# Altium PCB Flomio BLE-NFC.PcbDoc (part 1 of 2)
Units mil, origin at the board's own origin, x right, y up, seen from the top; angles counter-clockwise.
Board outline 3543.31 x 3543.31 mil, 2 copper layers (Top Layer, Bottom Layer), stack 61.2 mil thick; 153 components, 99 nets, 427 pads, 266 vias.
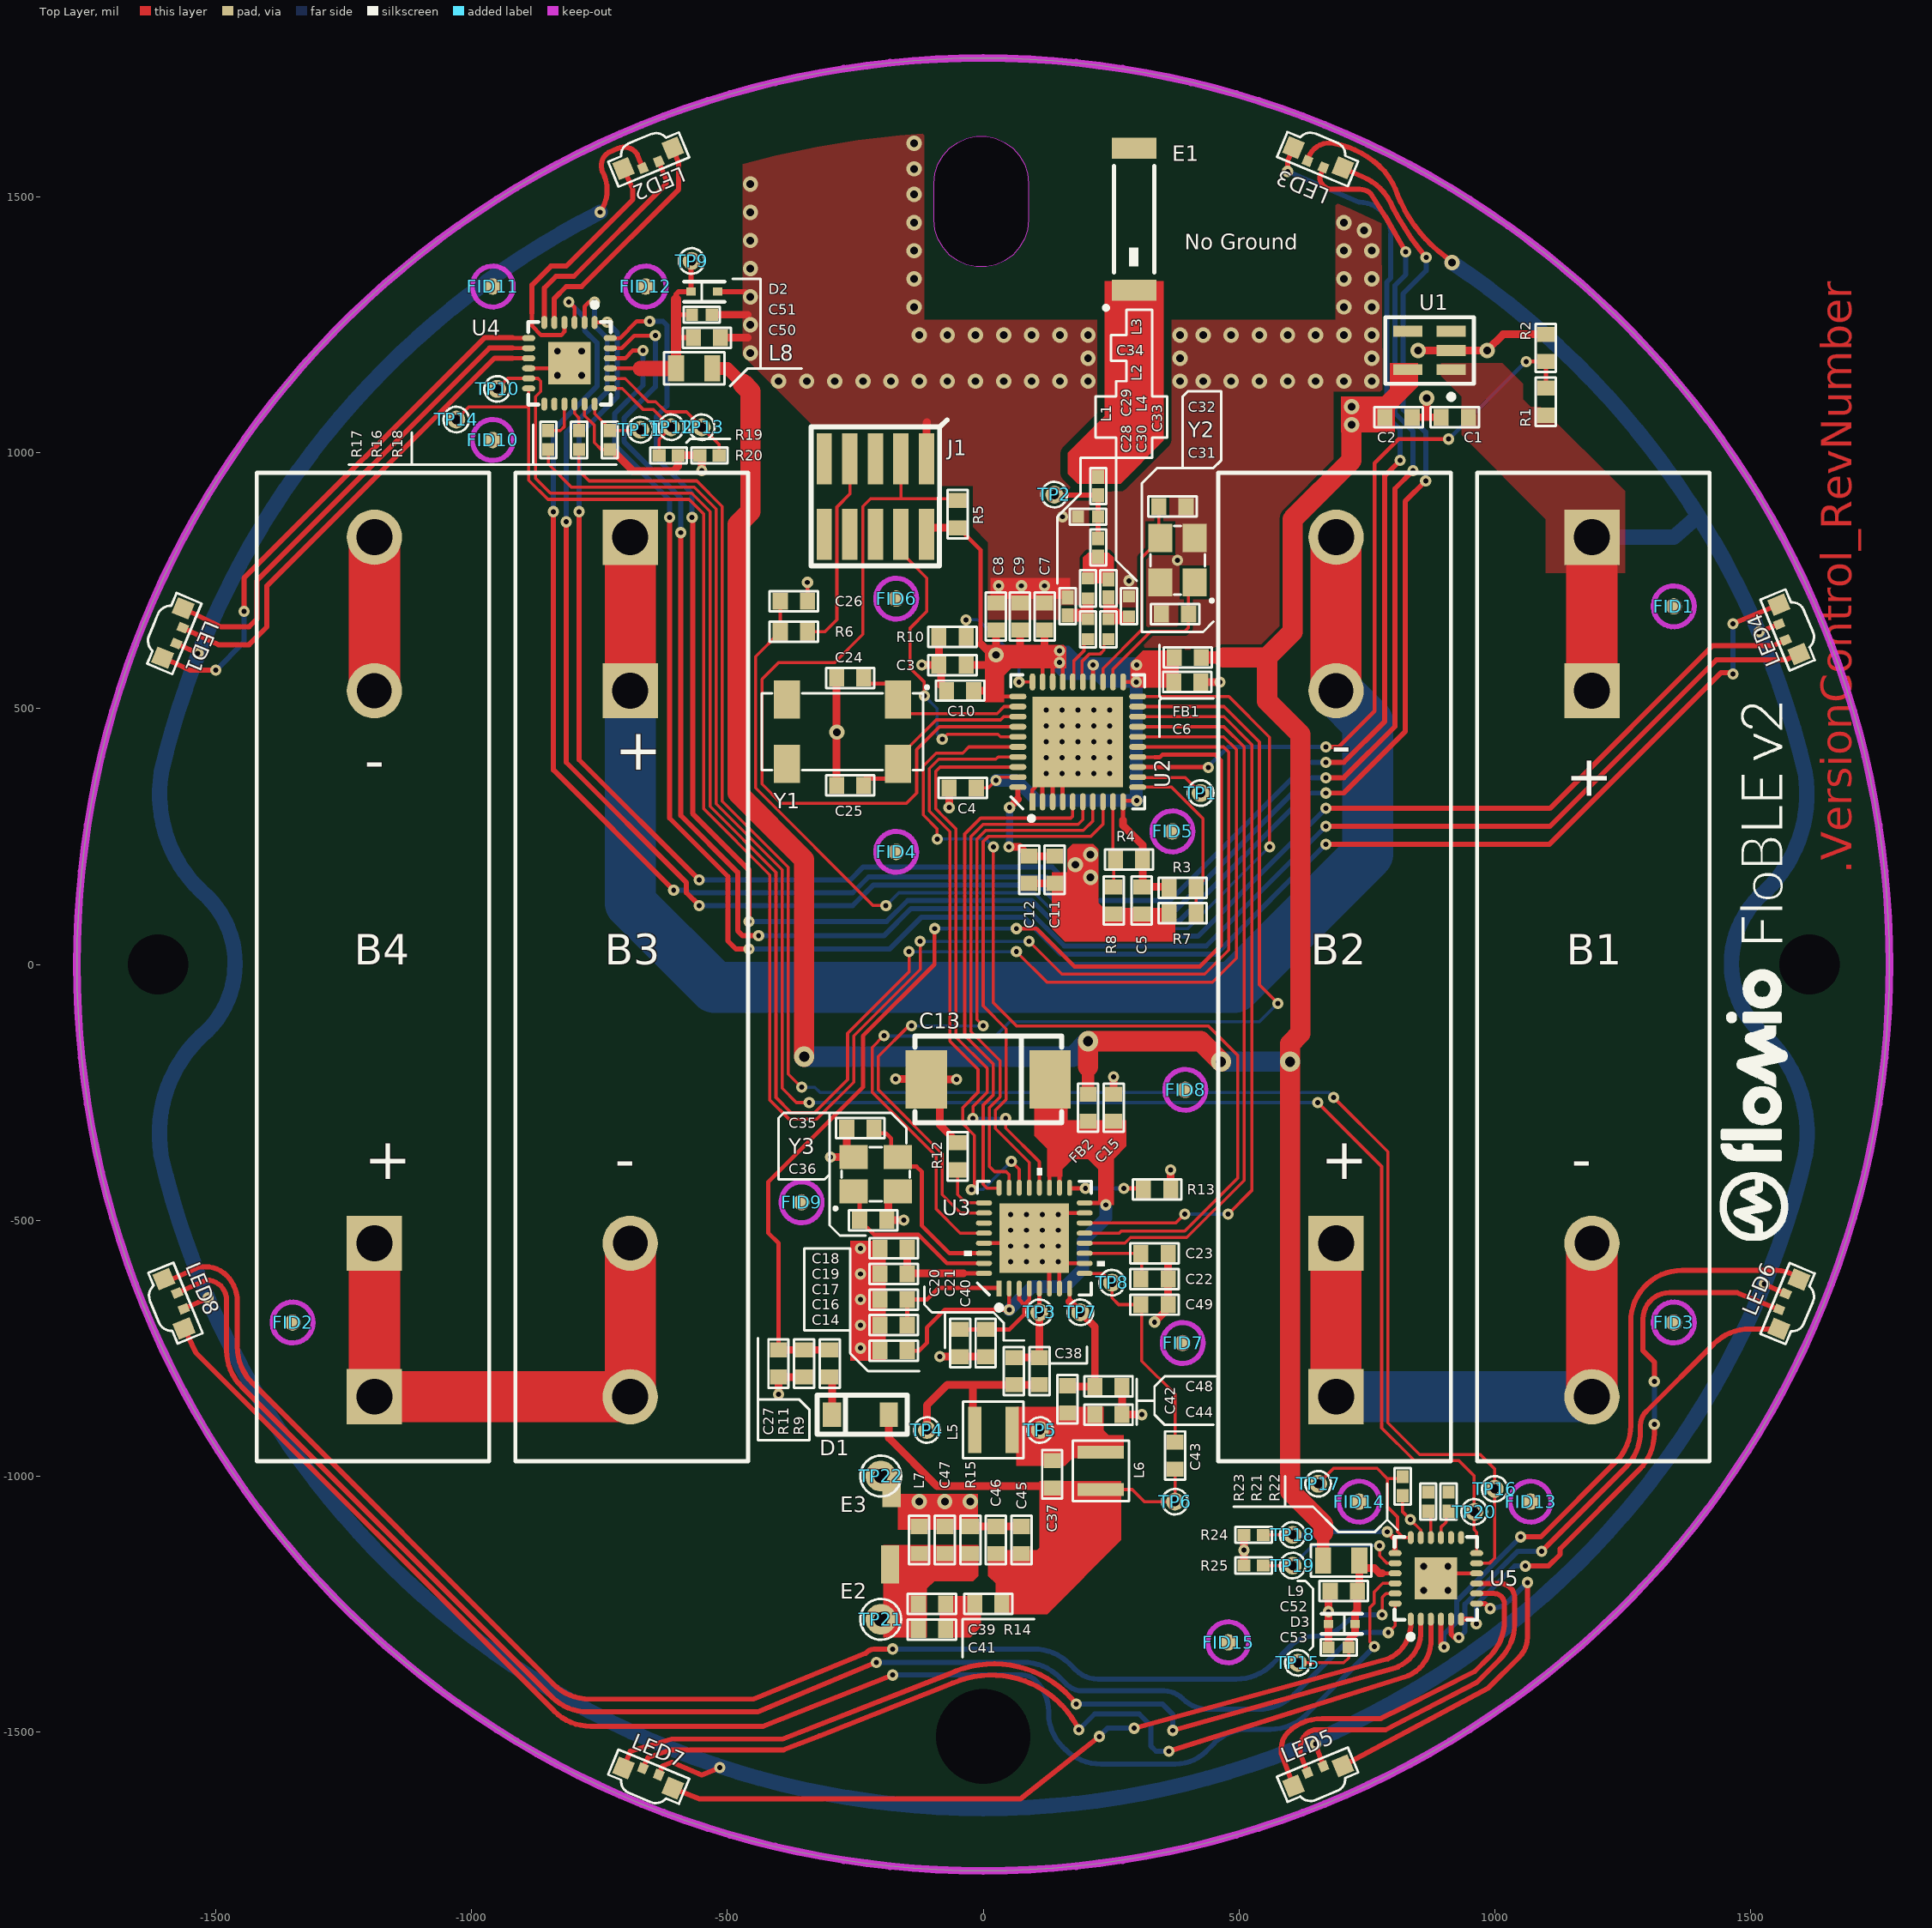
[diagram p0: Top Layer view]
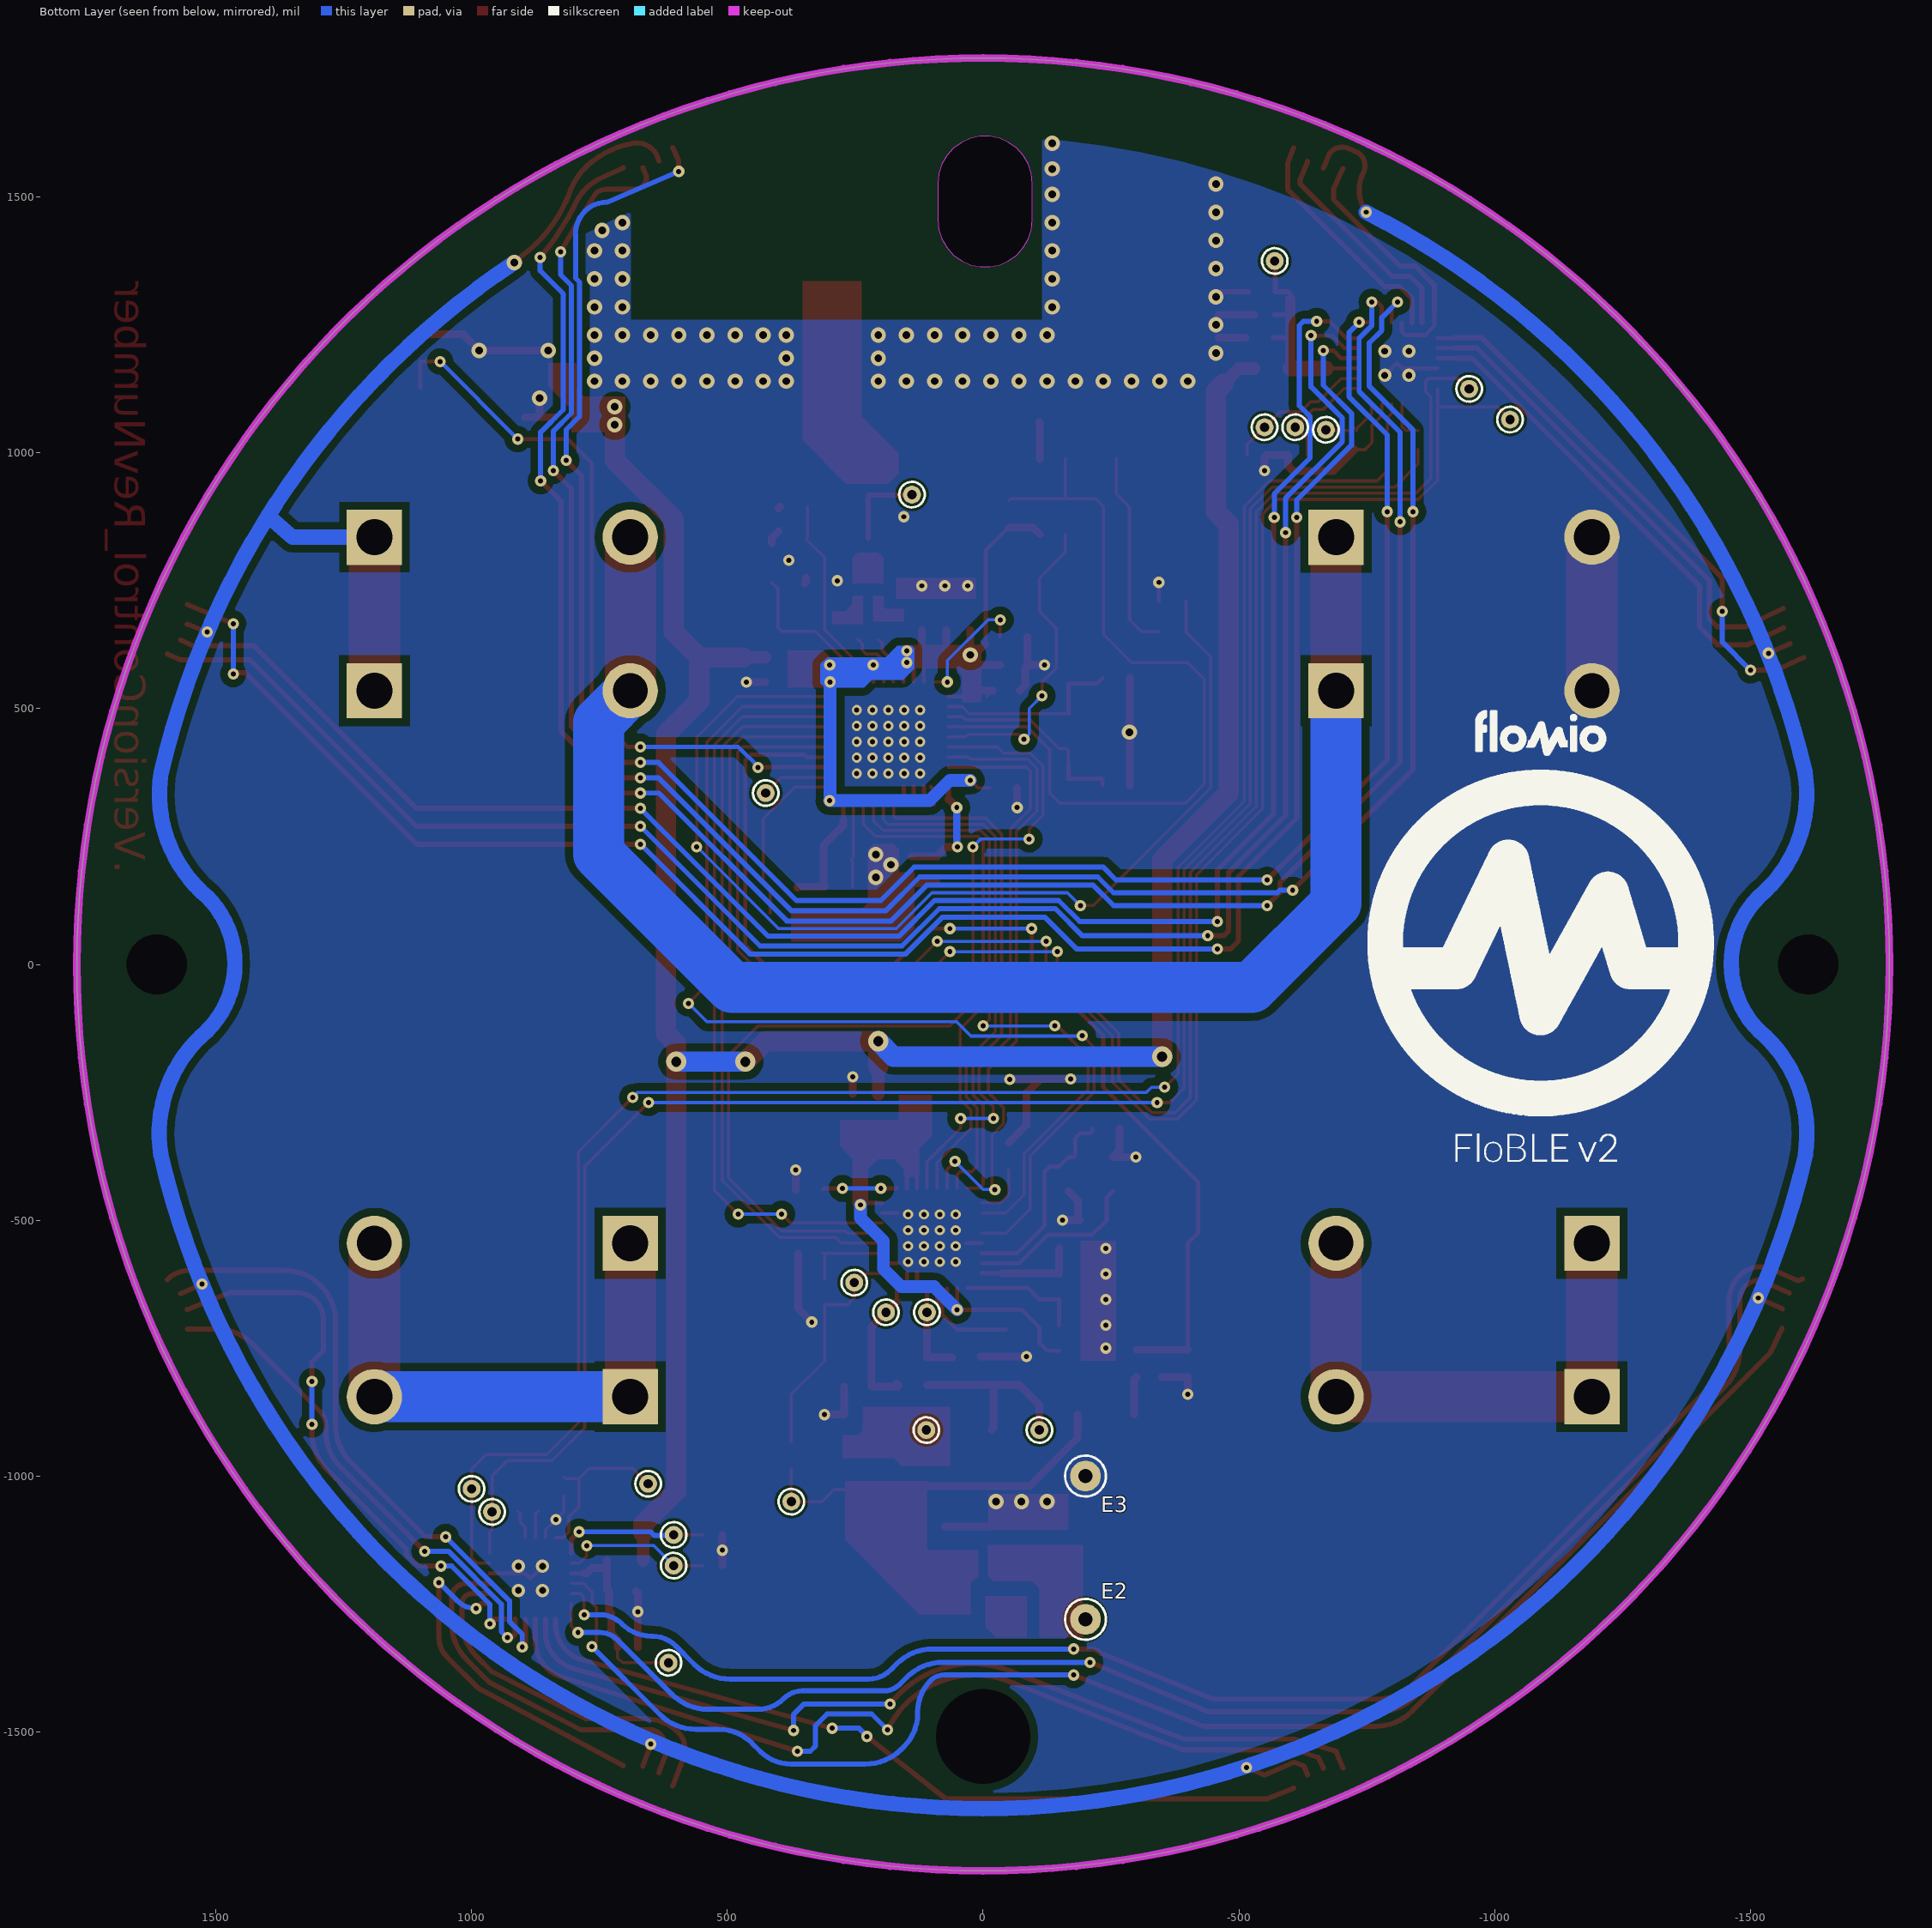
[diagram p1: Bottom Layer view, seen from below]

## Layer stack, top to bottom
Top Solder: solder mask 0.4, Solder Resist, Dk 3.5
Top Layer: signal copper 1.4
Dielectric1: core 58.4, FR-4, Dk 4.8
Bottom Layer: signal copper 1.4
Bottom Solder: solder mask 0.4, Solder Resist, Dk 3.5

## Board outline
-1771.65,0 ccw(c0,0) 0,-1771.65 ccw(c0,0) 1771.65,0 ccw(c0,0) 0,1771.65 ccw(c0,0)
cut-out: -96.32,1526.49 -94.3,1545.73 -88.32,1564.12 -78.65,1580.87 -65.71,1595.25 -50.06,1606.62 -32.39,1614.48 -13.47,1618.5 5.87,1618.5 24.79,1614.48 42.46,1606.62 58.11,1595.25 71.05,1580.87 80.72,1564.12 86.7,1545.73 88.72,1526.49 88.72,1455.63 86.7,1436.39 80.72,1417.99 71.05,1401.24 58.11,1386.87 42.46,1375.5 24.79,1367.63 5.87,1363.61 -13.47,1363.61 -32.39,1367.63 -50.06,1375.5 -65.71,1386.87 -78.65,1401.24 -88.32,1417.99 -94.3,1436.39 -96.32,1455.63

## Design rules (kind name [scope] priority, off if disabled: settings)
AcuteAngle [All] p1: minimum=7.00000000000000E+0001 checktracksonly=FALSE
Clearance Clearance_Bot-GND-Plane [InPolygon AND InNet('GND') AND OnLayer('Bottom Layer')] p1: gap=15
Clearance "Schematic Clearance Constraint" [InNet('BLE_ANT')] p2: gap=15
Clearance [All] p3: gap=6
Clearance Clearance_Grounds [InPolygon] p4: gap=15
FabricationTestPointUsage TestPointUsage [All] p1: valid=0 allowmultiple=FALSE
FabricationTestpoint Testpoint [All] p1: side=3 testpointundercomponent=TRUE minsize=40 maxsize=100 preferedsize=60 minholesize=20 maxholesize=40 preferedholesize=32 testpointgrid=1 allowsidetop=TRUE allowsidebottom=TRUE usegrid=TRUE gridtolerance=0.01
HoleSize HoleSize-drills [not InNetClass('All Nets')] p1: absolutevalues=TRUE maxlimit=1000 minlimit=1 maxpercent=80.000 minpercent=20.000
HoleSize [All] p2: absolutevalues=TRUE maxlimit=100 minlimit=1 maxpercent=80.000 minpercent=20.000
HoleToHoleClearance [All] p1: gap=3 allowstackedmicrovias=TRUE
MinimumAnnularRing [All] p1: minimumring=7.5
PasteMaskExpansion [All] p1: expansion=-1
PlaneClearance [All] p1: clearance=15
PlaneConnect [All] p1: planeconnectstyle=Relief reliefexpansion=10 reliefentries=4 reliefconductorwidth=15 reliefairgap=10
PolygonConnect PolygonConnect_1 [All] p1: connectstyle=Direct reliefconductorwidth=10 reliefentries=4 polygonreliefangle="90 Angle" airgapwidth=10
PolygonConnect PolygonConnect_ground [InNet('GND') And ispad] p2: connectstyle=Relief reliefconductorwidth=15 reliefentries=4 polygonreliefangle="90 Angle" airgapwidth=10
PolygonConnect [InNet('GND') and isvia] p3: connectstyle=Direct reliefconductorwidth=15 reliefentries=4 polygonreliefangle="45 Angle" airgapwidth=10
RoomDefinition "U_Flomio BLE-NFC - SoC" [InComponentClass('U_Flomio BLE-NFC - SoC')] p1: confinementstyle=ConfineIn formatcopy=TRUE lockcomponents=FALSE outline -3489.84,-811.2 -2089.84,-811.2 -2089.84,168.8 -3489.84,168.8
RoomDefinition "U_Flomio BLE-NFC - RFID" [InComponentClass('U_Flomio BLE-NFC - RFID')] p2: confinementstyle=ConfineIn formatcopy=TRUE lockcomponents=FALSE outline -3786.8,459.8 -2086.8,459.8 -2086.8,1459.8 -3786.8,1459.8
RoomDefinition "U_Flomio BLE-NFC - Power" [InComponentClass('U_Flomio BLE-NFC - Power')] p3: confinementstyle=ConfineIn formatcopy=TRUE lockcomponents=FALSE outline 2915,-498 5084.27,-498 5084.27,391 2915,391
RoomDefinition LED2 [InComponentClass('LED2')] p4: confinementstyle=ConfineIn formatcopy=TRUE lockcomponents=FALSE outline -1810.68,-2500.2 2001.2,-2500.2 2001.2,-2125.2 -1810.68,-2125.2
RoomDefinition LED1 [InComponentClass('LED1')] p5: confinementstyle=ConfineIn formatcopy=TRUE lockcomponents=FALSE outline -1798.8,2029.8 2001.2,2029.8 2001.2,2294.8 -1798.8,2294.8
RoutingVias [All] p1: holewidth=15 width=30 viastyle="Through Hole" minholewidth=10 minwidth=22 maxholewidth=25 maxwidth=50
SMDNeckDown [All] p1: percent=75.000
SMDToCorner [All] p1: distance=50000
SilkToSilkClearance [All] p1: silktosilkclearance=4
SilkToSolderMaskClearance SilkscreenOverComponentPads [IsPad] p1: minsilkscreentomaskgap=4 clearancetoexposedcopper=TRUE
SolderMaskExpansion [All] p1: expansion=2
Width "Schematic Width Constraint" [InNet('BLE_ANT')] p1: maxlimit=113 minlimit=113 preferedwidth=113
Width WidthDigital [InNetClass('Digital')] p2: maxlimit=6 minlimit=6 preferedwidth=6
Width WidthLowPower [InNetClass('Power')] p3: maxlimit=125 minlimit=9 preferedwidth=10
Width WidthVacPower [InNetClass('ACPower')] p4: maxlimit=200 minlimit=20 preferedwidth=20
Width [All] p5: maxlimit=200 minlimit=6 preferedwidth=10
21 further rules are at their usual default settings.

## Classes and differential pairs
component class LED1: C50 C51 D2 FID10 FID11 FID12 L8 LED1 LED2 LED3 LED4 R16 R17 R18 R19 R20 TP9 TP10 TP11 TP12 TP13 TP14 U4
component class LED2: C52 C53 D3 FID13 FID14 FID15 L9 LED5 LED6 LED7 LED8 R21 R22 R23 R24 R25 TP15 TP16 TP17 TP18 TP19 TP20 U5
component class "U_Flomio BLE-NFC - Power": B1 B2 B3 B4 C1 C2 C3 C4 C5 C6 C7 C8 C9 C10 C11 C12 C13 C14 C15 C16 C17 C18 C19 C20 C21 C22 C23 FB1 FB2 FID1 FID2 FID3 R1 R2 U1
component class "U_Flomio BLE-NFC - RFID": C35 C36 C37 C38 C39 C40 C41 C42 C43 C44 C45 C46 C47 C48 C49 E2 E3 FID7 FID8 FID9 L5 L6 L7 R12 R13 R14 R15 TP3 TP4 TP5 TP6 TP7 TP8 TP21 TP22 U3 Y3
component class "U_Flomio BLE-NFC - SoC": C24 C25 C26 C27 C28 C29 C30 C31 C32 C33 C34 D1 E1 FID4 FID5 FID6 J1 L1 L2 L3 L4 R3 R4 R5 R6 R7 R8 R9 R10 R11 TP1 TP2 U2 Y1 Y2
net class CI[1..2]: CI1 CI2
net class CO[1..2]: CO2
net class DI[1..2]: DI1 DI2
net class DO[1..2]: DO2
channel class "Flomio BLE-NFC - LED Array": LED1 LED2

## Components (designator, comment, footprint, x,y, rotation, side; value= is the part's Value field where it differs from the comment)
B1 "BATTCLIP_AAA" BATT/AAA/82 1190,-545 r270 top locked
B2 "BATTCLIP_AAA" BATT/AAA/82 690,535 r90 top locked
B3 "BATTCLIP_AAA" BATT/AAA/82 -690,-545 r270 top locked
B4 "BATTCLIP_AAA" BATT/AAA/82 -1190,535 r90 top locked
C1 "1.0uf" SM/C_0603 922.01,1069.53 r180 top (schematic designator C25)
C2 "2.2uf" SM/C_0603 812.01,1069.53 r0 top (schematic designator C27)
C3 "2.2uf" SM/C_0603 -60,585 r180 top (schematic designator C32)
C4 "1.0uf" SM/C_0603 -40,345 r180 top (schematic designator C33)
C5 "0.1uf" SM/C_0603 310,125 r270 top (schematic designator C34)
C6 "0.1uf" SM/C_0603 399,552 r0 top (schematic designator C35)
C7 "0.1uf" SM/C_0603 120,680 r90 top (schematic designator C36)
C8 "0.1uf" SM/C_0603 25,680 r90 top (schematic designator C37)
C9 "220pf" SM/C_0603 72,680 r90 top (schematic designator C38)
C10 "0.1uf" SM/C_0603 -45,535 r180 top (schematic designator C39)
C11 "1.0uf" SM/C_0603 140,185 r270 top (schematic designator C40)
C12 "0.01uf" SM/C_0603 90,185 r270 top (schematic designator C41)
C13 "150uf" SM/C_2917(7343m) 10,-225 r180 top (schematic designator C30)
C14 "0.01uf" SM/C_0603 -175,-755 r180 top (schematic designator C3)
C15 "2.2uf" SM/C_0603 255,-280 r90 top (schematic designator C5)
C16 "0.01uf" SM/C_0603 -175,-705 r180 top (schematic designator C1)
C17 "0.47uf" SM/C_0603 -175,-655 r180 top (schematic designator C2)
C18 "0.01uf" SM/C_0603 -175,-555 r180 top (schematic designator C28)
C19 "0.47uf" SM/C_0603 -175,-605 r180 top (schematic designator C29)
C20 "0.01uf" SM/C_0603 -45,-740 r270 top (schematic designator C6)
C21 "2.2uf" SM/C_0603 5,-740 r270 top (schematic designator C7)
C22 "0.01uf" SM/C_0603 335,-615 r0 top (schematic designator C21)
C23 "2.2uf" SM/C_0603 335,-565 r0 top (schematic designator C22)
C24 "22pf" SM/C_0603 -260,560 r0 top (schematic designator C42)
C25 "22pf" SM/C_0603 -260,350 r0 top (schematic designator C43)
C26 "1000pf" SM/C_0603 -370,710 r0 top (schematic designator C44)
C27 "100pf" SM/C_0603 -400,-780 r270 top (schematic designator C31)
C28 "18pf" SM/C_0402 205,655 r90 top (schematic designator C45)
C29 "1pf" SM/C_0402 205,735 r90 top (schematic designator C46)
C30 "18pf" SM/C_0402 245,655 r90 top (schematic designator C47)
C31 "10pf" SM/C_0603 375,685 r0 top (schematic designator C48)
C32 "10pf" SM/C_0603 370,895 r180 top (schematic designator C49)
C33 "1pf" SM/C_0402 285,700 r270 top (schematic designator C50)
C34 "1pf" SM/C_0402 205,875 r0 top (schematic designator C51)
C35 "27pf" SM/C_0603 -240,-320 r180 top (schematic designator C26)
C36 "27pf" SM/C_0603 -215,-500 r0 top (schematic designator C4)
C37 "10pf" SM/C_0603 135,-996.57 r270 top (schematic designator C13)
C38 "1500pf" SM/C_0603 110,-795 r270 top (schematic designator C8)
C39 "47pf" SM/C_0603 -100,-1250 r180 top (schematic designator C18)
C40 "1500pf" SM/C_0603 60,-795 r270 top (schematic designator C9)
C41 "5.6pf" SM/C_0603 -100,-1300 r180 top (schematic designator C19)
C42 "1200pf" SM/C_0603 165,-850 r90 top (schematic designator C10)
C43 "220pf" SM/C_0603 375,-960 r90 top (schematic designator C14)
C44 "680pf" SM/C_0603 245,-880 r0 top (schematic designator C12)
C45 "100pf" SM/C_0603 75,-1125 r90 top (schematic designator C16)
C46 "47pf" SM/C_0603 25,-1125 r90 top (schematic designator C17)
C47 "18pf" SM/C_0603 -75,-1125 r90 top (schematic designator C20)
C48 "1200pf" SM/C_0603 245,-825 r0 top (schematic designator C11)
C49 "680pf" SM/C_0603 335,-665 r0 top (schematic designator C15)
C50 "10uf" SM/C_0603 -540,1225 r0 top (schematic designator C23)
C51 "0.1uf" SM/C_0402 -550,1270 r0 top (schematic designator C24)
C52 "10uf" SM/C_0603 705,-1225 r180 top (schematic designator C23)
C53 "0.1uf" SM/C_0402 695,-1335 r180 top (schematic designator C24)
D1 "BAT54WS" SOD-323 -240,-880 r180 top
D2 "ESD5Z5.0" SOD-523 -545,1315 r180 top
D3 "ESD5Z5.0" SOD-523 700.98,-1289.02 r0 top (schematic designator D2)
E1 "2.4GHz Chip Ant" SM_ANT_Johanson-2450AT43A100E 295.28,1456.69 r90 top (schematic designator E3)
E2 "Antenna" CST/FLOMIO/ANT -182,-1173 r270 top (schematic designator E1)
E3 "Antenna" CST/FLOMIO/ANT -179,-1023 r270 top (schematic designator E2)
FB1 "1000 @ 100MHz" SM/I_0603 400,600 r180 top
FB2 "1000 @ 100MHz" SM/I_0603 205,-280 r270 top
FID1 "Fiducial, .032\"" FID32 1350,700 r0 top (schematic designator FID4)
FID2 "Fiducial, .032\"" FID32 -1350,-700 r0 top (schematic designator FID5)
FID3 "Fiducial, .032\"" FID32 1350,-700 r0 top (schematic designator FID6)
FID4 "Fiducial, .032\"" FID32 -170,220 r90 top (schematic designator FID10)
FID5 "Fiducial, .032\"" FID32 370,260 r90 top (schematic designator FID11)
FID6 "Fiducial, .032\"" FID32 -170,715 r90 top (schematic designator FID12)
FID7 "Fiducial, .032\"" FID32 390,-740 r90 top
FID8 "Fiducial, .032\"" FID32 395,-245 r90 top
FID9 "Fiducial, .032\"" FID32 -355,-465 r90 top
FID10 "Fiducial, .032\"" FID32 -958.7,1025 r180 top (schematic designator FID1)
FID11 "Fiducial, .032\"" FID32 -958.7,1325 r180 top (schematic designator FID2)
FID12 "Fiducial, .032\"" FID32 -660,1325 r180 top (schematic designator FID3)
FID13 "Fiducial, .032\"" FID32 1070,-1050 r180 top (schematic designator FID1)
FID14 "Fiducial, .032\"" FID32 735,-1050 r180 top (schematic designator FID2)
FID15 "Fiducial, .032\"" FID32 479,-1325 r180 top (schematic designator FID3)
J1 "HDR 10 PIN" HDR/SM/2X5/1.27MM -210.7,914.3 r180 top
L1 "2nH" SM/I_0402 165,700 r270 top (schematic designator L5)
L2 "1nH" SM/I_0402 225,815 r90 top (schematic designator L6)
L3 "3nH" SM/I_0402 225,935 r90 top (schematic designator L7)
L4 "2nH" SM/I_0402 245,735 r90 top (schematic designator L8)
L5 "150nH" SM/I_1008 20,-910 r0 top (schematic designator L2)
L6 "330nH" SM/I_1008 230,-990 r270 top (schematic designator L3)
L7 "1.5uH" SM/I_0603 -125,-1125 r90 top (schematic designator L4)
L8 "4.7uH" SM/I_0805 -565,1165 r180 top (schematic designator L1)
L9 "4.7uH" SM/I_0805 700,-1165 r0 top (schematic designator L1)
LED1 "RGB LED" LED/AVAGO/HSMF-C115 -1583.8,647.8 r67.5 top locked
LED2 "RGB LED" LED/AVAGO/HSMF-C115 -655,1575.84 r22.5 top
LED3 "RGB LED" LED/AVAGO/HSMF-C115 655,1576.76 r337.5 top
LED4 "RGB LED" LED/AVAGO/HSMF-C115 1575.24,654.99 r292.5 top locked
LED5 "RGB LED" LED/AVAGO/HSMF-C115 655,-1586.2 r202.5 top locked (schematic designator LED1)
LED6 "RGB LED" LED/AVAGO/HSMF-C115 1575.2,-664.2 r247.5 top locked (schematic designator LED2)
LED7 "RGB LED" LED/AVAGO/HSMF-C115 -655,-1590.24 r157.5 top locked (schematic designator LED3)
LED8 "RGB LED" LED/AVAGO/HSMF-C115 -1581.76,-663.01 r112.5 top locked (schematic designator LED4)
R1 "1.00M" SM/R_0603 1100,1100 r90 top (schematic designator R8)
R2 "255K, 0.1%" SM/R_0603 1100,1205 r90 top (schematic designator R9)
R3 "100K" SM/R_0603 390,150 r0 top (schematic designator R12)
R4 "100K" SM/R_0603 285,205 r180 top (schematic designator R17)
R5 "10.0K" SM/R_0603 -50,880 r90 top (schematic designator R10)
R6 "2.70K" SM/R_0603 -370,650 r180 top (schematic designator R11)
R7 "100K" SM/R_0603 390,100 r180 top (schematic designator R16)
R8 "100K" SM/R_0603 255,125 r270 top (schematic designator R18)
R9 "1.10K" SM/R_0603 -300,-780 r90 top (schematic designator R20)
R10 "56.0K" SM/R_0603 -60,640 r180 top (schematic designator R13)
R11 "1.10M" SM/R_0603 -350,-780 r270 top (schematic designator R19)
R12 "10.0K" SM/R_0603 -50,-375 r90 top (schematic designator R14)
R13 "10.0K" SM/R_0603 340,-440 r0 top (schematic designator R15)
R14 "Zero" SM/R_0603 10,-1250 r180 top (schematic designator R2)
R15 "1.20K" SM/R_0603 -25,-1125 r90 top (schematic designator R4)
R16 "33.0" SM/R_0402 -790,1025 r270 top (schematic designator R1)
R17 "33.0" SM/R_0402 -850,1025 r270 top (schematic designator R3)
R18 "698" SM/R_0402 -730,1025 r270 top (schematic designator R5)
R19 "698" SM/R_0402 -615,995 r0 top (schematic designator R6)
R20 "698" SM/R_0402 -535,995 r180 top (schematic designator R7)
R21 "33.0" SM/R_0402 870,-1050 r90 top (schematic designator R1)
R22 "33.0" SM/R_0402 910,-1050 r90 top (schematic designator R3)
R23 "698" SM/R_0402 820,-1020 r270 top (schematic designator R5)
R24 "698" SM/R_0402 528.7,-1115 r180 top (schematic designator R6)
R25 "698" SM/R_0402 528.7,-1175 r180 top (schematic designator R7)
TP1 "TP" VIA18 425,335 r90 top (schematic designator TP14)
TP2 "TP" VIA18 139.1,918.3 r90 top (schematic designator TP15)
TP3 "TX" VIA18 110,-680 r90 top (schematic designator TP10)
TP4 "TP" VIA18 -110,-910 r90 top
TP5 "TP" VIA18 111,-910 r90 top
TP6 "TP" VIA18 375,-1050 r90 top
TP7 "RX1" VIA18 190,-680 r90 top (schematic designator TP11)
TP8 "RX2" VIA18 251.96,-621.96 r90 top (schematic designator TP12)
TP9 "TP" VIA18 -570,1375 r180 top (schematic designator TP1)
TP10 "TP" VIA18 -950,1125 r180 top (schematic designator TP2)
TP11 "TP" VIA18 -670,1045 r180 top (schematic designator TP3)
TP12 "TP" VIA18 -610,1050 r180 top (schematic designator TP7)
TP13 "TP" VIA18 -550,1050 r180 top (schematic designator TP8)
TP14 "TP" VIA18 -1030,1065 r180 top (schematic designator TP9)
TP15 "TP" VIA18 615,-1365 r180 top (schematic designator TP1)
TP16 "TP" VIA18 1000,-1025 r180 top (schematic designator TP2)
TP17 "TP" VIA18 655,-1015 r180 top (schematic designator TP3)
TP18 "TP" VIA18 605,-1115 r180 top (schematic designator TP7)
TP19 "TP" VIA18 605,-1175 r180 top (schematic designator TP8)
TP20 "TP" VIA18 960,-1070 r180 top (schematic designator TP9)
TP21 "TP" VIA28 -200,-1280 r90 top
TP22 "TP" VIA28 -200,-1000 r90 top
U1 "TPS70933" SOT23-5 915,1162.6 r90 top (schematic designator U2)
U2 "CC2540F" RHA40_4P5X4P5 185,435 r90 top (schematic designator U4)
U3 "TRF7970A" QFN50P500X500X100-32N 100,-535 r90 top
U4 "MBI6024" QFN50P400X400X80-24N -808.7,1175 r270 top (schematic designator U1)
U5 "MBI6024" QFN50P400X400X80-24N 885,-1200 r90 top (schematic designator U1)
Y1 "32.768KHz" CRYSTAL/ABS25 -275,455 r180 top (schematic designator Y2)
Y2 "32MHz" CRYSTAL/ABM8G 380,790 r90 top (schematic designator Y3)
Y3 "13.560MHz" CRYSTAL/ABM8G -210,-410 r0 top (schematic designator Y1)

## Footprints (in the part's own frame and the unit in brackets; to place one, negate y for a bottom-side part, rotate by r counter-clockwise, add the part's x,y. Pads: shape width x height; smd on the part's side, far side on the other; paste and mask are expansions set on the pad)
BATT/AAA/82 [mil] "Battery Holder: 2 X 82 Clips for a Single AAA Battery"
  rect 108x108 hole 70: 1(-1380,0) 1(-1080,0)
  round 108 hole 68: 2(0,0)
  round 108 hole 70: 2(300,0)
  silkscreen extent -1506,-224 426,230, body extent -1463,-211 383,211, height 525
CRYSTAL/ABM8G [mm]
  rect 1.4x1.2 smd: 1(-1.1,-0.85) 2(1.1,-0.85) 3(1.1,0.85) 4(-1.1,0.85)
  silkscreen extent -2.03,-1.73 1.7,1.35, body extent -1.6,-1.25 1.6,1.25, height 0.99
CRYSTAL/ABS25 [mm]
  rect 1.3x1.9 smd: 1(-2.75,-1.6) 2(2.75,-1.6) 3(2.75,1.6) 4(-2.75,1.6)
  silkscreen extent -4.23,-2.23 4,1.9, body extent -4,-1.99 4,2.01, height 2.7
CST/FLOMIO/ANT [mm]
  rect 1.9x0.9 smd: 1(0,0)
FID32 [mil]
  round 32 smd: ""(0,0)
  Top Layer keep-out circle w10: c0,0 r40
HDR/SM/2X5/1.27MM [mil]
  rect 30x100 smd: 1(-100,-73.62) 2(-100,73.62) 3(-50,-73.62) 4(-50,73.62) 5(0,-73.62) 6(0,73.62) 7(50,-73.62) 8(50,73.62) 9(100,-73.62) 10(100,73.62)
  silkscreen extent -140,-150 126,135, body extent -125,-118 125,112, height 235
LED/AVAGO/HSMF-C115 [mm] "SMT"
  rect 0.85x0.9 smd mask+0.025: 1(-1.325,0) 4(1.325,0)
  rect 0.45x0.5 smd mask+0.025: 2(-0.425,-0.35) 3(0.425,-0.35)
  silkscreen extent -1.9,-0.75 1.9,1.05, body extent -1.25,-0.25 1.25,0.76, height 1.02
QFN50P400X400X80-24N [mm] "QFN, 24-Leads, Body 4.1x4.1mm (max), Pitch 0.50mm, IPC Medium Density"
  oval 0.65x0.3 smd: 1(-2.025,1.25) 2(-2.025,0.75) 3(-2.025,0.25) 4(-2.025,-0.25) 5(-2.025,-0.75) 6(-2.025,-1.25) 13(2.025,-1.25) 14(2.025,-0.75) 15(2.025,-0.25) 16(2.025,0.25) 17(2.025,0.75) 18(2.025,1.25)
  oval 0.3x0.65 smd: 7(-1.25,-2.025) 8(-0.75,-2.025) 9(-0.25,-2.025) 10(0.25,-2.025) 11(0.75,-2.025) 12(1.25,-2.025) 19(1.25,2.025) 20(0.75,2.025) 21(0.25,2.025) 22(-0.25,2.025) 23(-0.75,2.025) 24(-1.25,2.025)
  rect 2.1x2.1 smd: 25(0,0)
  silkscreen extent -3.02,-2.05 2.05,2.05, body extent -2.05,-2.05 2.05,2.05, height 0.8
QFN50P500X500X100-32N [mm] "QFN, 32-Leads, Body 5.2x5.2mm (max), Pitch 0.50mm, IPC Medium Density"
  rect 0.8x0.25 smd: 1(-2.5,1.75)
  oval 0.8x0.25 smd: 2(-2.5,1.25) 3(-2.5,0.75) 4(-2.5,0.25) 5(-2.5,-0.25) 6(-2.5,-0.75) 7(-2.5,-1.25) 8(-2.5,-1.75) 17(2.5,-1.75) 18(2.5,-1.25) 19(2.5,-0.75) 20(2.5,-0.25) 21(2.5,0.25) 22(2.5,0.75) 23(2.5,1.25) 24(2.5,1.75)
  oval 0.25x0.8 smd: 9(-1.75,-2.5) 10(-1.25,-2.5) 11(-0.75,-2.5) 12(-0.25,-2.5) 13(0.25,-2.5) 14(0.75,-2.5) 15(1.25,-2.5) 16(1.75,-2.5) 25(1.75,2.5) 26(1.25,2.5) 27(0.75,2.5) 28(0.25,2.5) 29(-0.25,2.5) 30(-0.75,2.5) 31(-1.25,2.5) 32(-1.75,2.5)
  rect 3.45x3.45 smd paste-25.4: 33(0,0)
  silkscreen extent -3.57,-3.49 3.49,3.49, body extent -2.5,-2.5 2.5,2.5, height 0.71
RHA40_4P5X4P5 [mm]
  rect 0.85x0.28 smd: 1(-2.975,2.25)
  oval 0.85x0.28 smd: 2(-2.975,1.75) 3(-2.975,1.25) 4(-2.975,0.75) 5(-2.975,0.25) 6(-2.975,-0.25) 7(-2.975,-0.75) 8(-2.975,-1.25) 9(-2.975,-1.75) 10(-2.975,-2.25) 21(2.975,-2.25) 22(2.975,-1.75) 23(2.975,-1.25) 24(2.975,-0.75) 25(2.975,-0.25) 26(2.975,0.25) 27(2.975,0.75) 28(2.975,1.25) 29(2.975,1.75) 30(2.975,2.25)
  oval 0.28x0.85 smd: 11(-2.251,-2.975) 12(-1.75,-2.975) 13(-1.25,-2.975) 14(-0.75,-2.975) 15(-0.25,-2.975) 16(0.25,-2.975) 17(0.75,-2.975) 18(1.25,-2.975) 19(1.75,-2.975) 20(2.251,-2.975) 31(2.251,2.975) 32(1.75,2.975) 33(1.25,2.975) 34(0.75,2.975) 35(0.25,2.975) 36(-0.25,2.975) 37(-0.75,2.975) 38(-1.25,2.975) 39(-1.75,2.975) 40(-2.251,2.975)
  rect 4.5x4.5 smd paste-2.237 mask-2.235: 41(0,0)
  silkscreen extent -3.9,-3.33 3.33,3.33, body extent -3.08,-3.07 3.07,3.08, height 1.04
SM/C_0402 [mm] "0402 Cap"
  rect 0.6x0.6 smd: 1(-0.5,0) 2(0.5,0)
  silkscreen extent -0.9,-0.4 0.9,0.4, body extent -0.53,-0.28 0.53,0.28, height 0.4
SM/C_0603 [mm] "0603 Cap"
  rect 0.75x0.85 smd: 1(-0.675,0) 2(0.675,0)
  silkscreen extent -1.2,-0.5 1.2,0.5, body extent -0.82,-0.48 0.82,0.48, height 0.5
SM/C_2917(7343m) [mm]
  rect 2.05x2.9 smd: 1(-3.075,0) 2(3.075,0)
  silkscreen extent -3.65,-2.15 3.65,2.15, body extent -3.65,-2.15 3.65,2.15, height 3
SM/I_0402 [mm] "0402 Inductor"
  rect 0.7x0.6 smd: 1(-0.45,0) 2(0.45,0)
  silkscreen extent -0.9,-0.4 0.9,0.4, body extent -0.53,-0.28 0.53,0.28, height 0.4
SM/I_0603 [mm] "0603 Inductor"
  rect 0.75x0.85 smd: 1(-0.675,0) 2(0.675,0)
  silkscreen extent -1.2,-0.5 1.2,0.5, body extent -0.82,-0.48 0.82,0.48, height 0.5
SM/I_0805 [mm] "0805 Inductor"
  rect 0.8x1.3 smd: 1(-0.9,0) 2(0.9,0)
  silkscreen extent -1.5,-0.8 1.5,0.8, body extent -1.1,-0.7 1.1,0.7, height 0.5
SM/I_1008 [mm] "1008 Inductor"
  rect 0.65x2.3 smd: 1(-0.925,0) 2(0.925,0)
  silkscreen extent -1.5,-1.4 1.5,1.4, body extent -1.2,-1 1.2,1, height 1.6
SM/R_0402 [mm] "0402 Resistor"
  rect 0.65x0.6 smd: 1(-0.475,0) 2(0.475,0)
  silkscreen extent -0.9,-0.4 0.9,0.4, body extent -0.53,-0.27 0.53,0.28, height 0.4
SM/R_0603 [mm] "0603 Resistor"
  rect 0.75x0.9 smd: 1(-0.675,0) 2(0.675,0)
  silkscreen extent -1.2,-0.5 1.2,0.5, body extent -0.82,-0.48 0.82,0.48, height 0.5
SM_ANT_Johanson-2450AT43A100E [mm] "Chip Antenna, 2-Leads, Body 7.00x2.00mm, IPC Medium Density"
  rect 1.04x2.2 smd: 1(-3.53,0) 2(3.53,0)
  silkscreen extent -4.5,-1 2.65,1.5, body extent -3.6,-1.1 3.6,1.1, height 1.3
SOD-323 [mil]
  rect 36x48 smd paste+0 mask+2: 1(-55.5,0) 2(55.5,0)
  silkscreen extent -92,-38 84,38, body extent -51,-27 51,27, height 44
SOD-523 [mm]
  rect 0.48x0.4 smd: 1(-0.66,0) 2(0.66,0)
  silkscreen extent -1,-0.5 1,0.5, body extent -0.65,-0.45 0.65,0.45, height 0.7
SOT23-5 [mm]
  rect 0.55x1.45 smd: 1(0,0) 2(0.95,0) 3(1.9,0) 4(1.9,2.15) 5(0,2.15)
  silkscreen extent -1.47,-1.12 2.6,3.27, body extent -0.53,-0.14 2.47,2.36, height 1.12
VIA18 [mil]
  round 35 hole 18: 1(0,0)
  silkscreen extent -25,-25 25,25
VIA28 [mil]
  round 60 hole 28: 1(0,0)
  silkscreen extent -40,-40 40,40

## Part data
B1 B2 B3 B4: "AAA Battery"
C1 C4 C11: library part GRM188R71A105KA61, "Cap, 0603, 1.0uf, 10V, 10%, X7R"
C2 C3 C15 C21 C23: library part GRM188R61A225ME34D, "Cap, 0603, 2.2uf , 10V, 20%, X5R"
C5 C6 C7 C8 C10: library part GRM188R71C104KA01, "Cap, 0603, 0.1uf, 16V, 10%, X7R"
C9 C43: library part CC0603KRX7R9BB221, "Cap, 0603, 220pf, 50V, 10%, X7R"
C12 C14 C16 C18 C20 C22: library part C0603C103M3RACTU, "Cap, 0603, 0.01uf, 10000pf, 25V, 20%, X7R"
C13: library part RVB0J151MNG, "Cap, SMT 2917, 150uf, 6.3V, 20%, Al Ele"
C17 C19: library part GRM188R61A474KA61, "Cap, 0603, 0.47uf, 10V, 10%, X5R"
C24 C25: library part GRM1885C1H220JA01D, "Cap, 0603, 22pf , 50V, 5%, COG"
C26: library part GRM1885C1H102JA01, "Cap, 0603, 1000pf, 50V, 5%,"
C27 C45: library part 06035A101JAT2A, "Cap, 0603, 100pf, 50V, 5%, C0G, NP0"
C28 C30: library part GRM1555C1H180JZ01, "Cap, 0402, 18pf, 50V, 5%, C0G, NP0"
C29 C33 C34: library part GRM1555C1H1R0CZ01, "Cap, 0402, 1pf, 50V, ±0.25pF, C0G, NP0"
C31 C32 C37: library part 06035A100JAT2A, "Cap, 0603, 10pf, 50V, 5%, C0G, NP0"
C35 C36: library part C0603C270J5GACTU, "Cap, 0603, 27pf , 50V, 5%, C0G, NP0"
C38 C40: library part CC0603KRX7R9BB152, "Cap, 0603, 1500pf, 50V, 10%, X7R"
C39: library part GRM1885CD1H470JA01D, "Cap, 0603, 47pf , 50V, 5%, C0G, NP0"
C41: library part GRM1885C1H5R6DZ01D, "Cap, 0603, 5.6pf, 50V, ±0.5pF"
C42 C48: library part GRM1885C1H122JA01, "Cap, 0603, 1200pf, 50V, 5%, C0G, NP0"
C44 C49: library part C0603C681K5RACTU, "Cap, 0603, 680pf , 50V, 10%, X7R"
C46: library part 06031A470JAT2A, "Cap, 0603, 47pf, 100V, 5%, C0G, NP0"
C47: library part GCM1885C1H180JA16, "Cap, 0603, 18pf, 50V, 5%, C0G, NP0"
C50 C52: library part GRM188R60J106ME47, "Cap, 0603, 10uf, 6.3V, 20%,"
C51 C53: library part GRM155R71C104KA88, "Cap, 0402, 0.1uf, 16V, 10%"
D1: library part BAT54WS-7-F, "Diode, Schottky, 200MA, 30V, SOD323"
D2 D3: library part ESD5Z5.0T1G, "TVS, ESD, 5.0V, 30KV Pk, Unidirectional, SMT"
E1: library part 2450AT43A100E, "Antenna, Chip, 2.4GHz, 0.5 dBi Gain, BLE"
E2 E3: library part "Flomio Antenna", "Antenna, No part"
FB1 FB2: library part BLM18HE102SN1, "EMI Bead, 0603, 1000 OHM @ 100MHz, Ferrite, .35 DCR"
FID1 FID2 FID3 FID4 FID5 FID6 FID7 FID8 FID9 FID10 FID11 FID12 FID13 FID14 FID15: library part FID32, "Fiducual, .032\" Pad"
J1: library part FTS-105-01-F-DV, "Header, Dual Row, 10 pin, 1.27MM, Male, SMT"
L1 L4: library part LQG15HS2N0S02, "Inductor, 0402, 2nH, 300mA, ±0.3nH"
L2: library part LQG15HS1N0S02, "Inductor, 0402, 1nH, 300mA, ±0.3nH"
L3: library part LQG15HS3N0S02, "Inductor, 0402, 3nH, 300mA, ±0.3nH"
L5: library part LQW2UASR15J00L, "Inductor, 1008, 150nH, 580mA, SRF 850MHz, SMT, 5%"
L6: library part PM1008-R33K-RC, "Inductor, 1008, 330nH, 0.33uH, 500mA, SRF 570MHz, SMT, 10%"
L7: library part MLF1608A1R5K, "Inductor, 0603, 1.5uH, 50mA, 10MHz, SMT, 0603, 10%"
L8 L9: library part LQG21C4R7N00T1, "Inductor, 4.7uH, 0805"
LED1 LED2 LED3 LED4 LED5 LED6 LED7 LED8: library part HSMF-C115, "Diode, Led, RGB, Side looking"
R1: library part CRCW06031M00F, "Resistor, 0603, 1.00M Ohm 1%"
R2: library part ERA-3AEB2553V, "Resistor, 0603, 255K Ohm, 0.1%"
R3 R4 R7 R8: library part CRCW0603100KF, "Resistor, 0603, 100K Ohm 1%"
R5 R12 R13: library part CRCW060310K0F, "Resistor, 0603, 10.0K Ohm 1%"
R6: library part CRCW06032K70F, "Resistor, 0603, 2.70k Ohm 1%"
R9: library part ERJ-3EKF1101V, "Resistor, 0603, 1.10K Ohm 1%"
R10: library part CRCW060356K0F, "Resistor, 0603, 56.0K Ohm, 1/10W, 1%"
R11: library part ERJ-3EKF1104V, "Resistor, 0603, 1.10M Ohm 1%"
R14: library part ERJ-3GEY0R00V, "Resistor, 0603, Zero Ohm"
R15: library part CRCW06031K20FKEA, "Resistor, 0603, 1.20K Ohm 1%"
R16 R17 R21 R22: library part CRCW040233R0F, "Resistor, 0402, 33.0 Ohm 1%"
R18 R19 R20 R23 R24 R25: library part CRCW0402698RFK, "Resistor, 0402, 698 Ohm 1%"
TP1 TP2 TP3 TP4 TP5 TP6 TP7 TP8 TP9 TP10 TP11 TP12 TP13 TP14 TP15 TP16 TP17 TP18 TP19 TP20: library part TP18, "Testpoint, 18mil Hole, No part, just via"
TP21 TP22: library part TP28, "Testpoint, 28mil Hole, No part, just via"
U1: library part TPS70933DBVR, "Regulator, 3.3V, LDO, 150mA, Linear Regulator, 1uA Iq, Vin 2.7-30 V"
U2: library part CC2540F256RHAT, "Bluetooth Low Energy, SoC, 2.56GHz, 1Mbps, TI, -93dBm, 256kB Flash, 8kB RAM, 6x6mm VQFN"
U3: library part TRF7970ARHBR, "RFID/NFC Transceiver, 13.56MHz, 32QFN"
U4 U5: library part MBI6024GFN, "IC, Driver, 3x4 Led Driver, QFN24"
Y1: library part ABS25-32.768KHZ-T, "Crystal, SMT, 32.768KHz, 12.5pf"
Y2: library part ABM8G-32.000MHZ-B4Y-T, "Crystal, SMT, 32MHz, 10pF"
Y3: library part ABM8G-13.560MHZ-18-D2Y-T, "Crystal, SMT, 13.560MHz, 18pF"

## Free pads (board coordinates)
  round 0 hole 118.11 unplated: 1(-1612.97,0) 1(1615.37,0)
  round 0 hole 185.04 unplated: 1(0,-1508.7)

## Via types
v1: diameter 22, hole 10, Top Layer to Bottom Layer, tented both sides, 138 vias
v2: diameter 30, hole 15, Top Layer to Bottom Layer, tented both sides, 74 vias
v3: diameter 20, hole 10, Top Layer to Bottom Layer, 41 vias
v4: diameter 25.98, hole 12.99, Top Layer to Bottom Layer, tented top, 8 vias
v5: diameter 40, hole 20, Top Layer to Bottom Layer, tented both sides, 4 vias
v6: diameter 22, hole 10, Top Layer to Bottom Layer, 1 vias

## Nets (pads, with @x,y where several pads share a name; then routed paths per layer and width w, separated by ;. In a path a pad name is that pad's centre, name@x,y a point inside that pad or via, vN(x,y) a via of type N, cw(c..) or ccw(c..) an arc to the next point about the centre after c; other vN are vias at no path point)
ANT_MON: C37.2 C43.1 C45.1 C46.1 D1.1 L6.2 R14.1 TP6.1 | length 619.2
  Top Layer w6: L6.2@230,-1026.42 291.42,-1026.42 315,-1050 TP6.1@375,-1050 C43.1@375,-986.57
  Top Layer w15: D1.1@-184.5,-880 -184.5,-925.5 -90,-1020 C37.2@131.85,-1020
ASK: U2.17 U3.12 | length 1434.7
  Top Layer w6: U3.12@197.44,-544.84 277.15,-544.84 288,-534 398,-534 510,-422 510,425 470.47,464.53 U2.17@302.13,464.53
BAND_GAP: C22.1 C23.1 U3.11 | length 166.2
  Top Layer w6: U3.11@197.44,-564.53 197.91,-565 C23.1@313.43,-565 ; C22.1@310,-615 C23.1@310,-565
BATDTCT: R1.2 R2.1 U2.13 | length 1463.3
  Top Layer w8: U2.13@302.13,385.78 439.22,385.78 v1(440,385) ; v1(670,425) 695,425 765,495 765,980 811.85,1026.85 v1(910,1026.85) ; v1(1061.57,1178.43) R2.1@1100,1178.43 R1.2@1100,1126.57
  Bottom Layer w8: v1@439.22,385.78 478.45,425 v1(670,425) ; v1(910,1026.85) v1(1061.57,1178.43)
BLE_ANT: E1.1 L3.2
BRD_ID1: R3.2 R7.1 U2.11 | length 343.9
  Top Layer w6: U2.11@302.13,346.4 368.6,346.4 430,285 430,163.43 R3.2@416.57,150 R7.1@416.57,100
BRD_ID2: R4.2 R8.1 U2.9 | length 169.6
  Top Layer w6: U2.9@253.9,317.87 253.9,209.53 R4.2@258.43,205 255,201.57 R8.1@255,151.57
CI1: TP10.1 U2.16 U4.11 | length 3630.8
  Top Layer w6: TP10.1@-950,1125 -929.53,1145.47 U4.11@-888.43,1145.47 -870.47,1145.47 -865,1140 -865,1120 -875,1110 -875,950 -846,921 -569.94,921 -534,885.06 -534,309.03 -405,180.03 -405,-260 -375,-290 -330,-290 -265,-225 -265,-134.64 -145,-14.64 v1(-145,25) ; v1(65,25) 125,-35 448,-35 495,12 495,420 470.15,444.85 U2.16@302.13,444.85
  Bottom Layer w6: v1(-145,25) v1(65,25)
CI2: R16.2 TP16.1 U5.11 | length 3737.6
  Top Layer w6: R16.2@-790,1006.3 -790,965 -770,945 -560,945 -510,895 -510,318.97 -381,189.97 -381,-214 v1(-355,-240) ; v1(685,-260) 791,-366 791,-896 853,-958 972.02,-958 1000,-985.98 TP16.1@1000,-1025 1000,-1160 989.53,-1170.47 U5.11@964.72,-1170.47
  Bottom Layer w6: v1(-355,-240) -329,-240 -319,-250 675,-250 v1(685,-260)
CLK: U2.7 U3.26 | length 1297.6
  Top Layer w6: v1(-140,-120) -145,-120 -205,-180 -205,-245 -80,-370 -80,-450 -44.23,-485.77 U3.26@2.56,-485.77 ; v1(0,-120) -12,-108 -12,244.97 5.03,262 196.06,262 214.53,280.47 U2.7@214.53,317.87
  Bottom Layer w6: v1(-140,-120) v1(0,-120)
CO2: R21.2
DBG_CLK: J1.3 R5.2 U2.34 | length 1586.2
  Top Layer w6: -160.7,910.7 J1.3@-160.7,987.92 ; R5.2@-50,906.57 -53.43,910 -220,910 -235,895 -235,645 -290,590 -400,590 -432.48,557.52 -432.48,352.48 -395,315 -150,315 -130,335 -130,420 -85.47,464.53 U2.34@67.87,464.53
DBG_DATA: J1.4 U2.35 | length 618.4
  Top Layer w6: J1.4@-160.7,840.68 -160.7,805.7 -110,755 -110,690 -143.28,656.72 -143.28,580 -115,551.72 v1(-115,525) ; v1(-80,440) -70,450 28.85,450 34,444.85 U2.35@67.87,444.85 U2.35@66.03,443
  Bottom Layer w6: v1(-115,525) -90,500 -90,450 v1(-80,440)
DCOUPL: C11.1 C12.1 U2.40 | length 220.8
  Top Layer w10: 67.87,322.87 U2.40@67.87,346.4
  Top Layer w15: v1(50,230) 71.57,230 C12.1@90,211.57 C11.1@140,211.57 ; v1(51.57,306.57) 67.87,322.87
  Bottom Layer w15: v1@51.57,230 v1(51.57,306.57)
DI1: TP14.1 U2.15 U4.12 | length 3655.7
  Top Layer w6: TP14.1@-1030,1065 -1005,1090 -888.43,1090 ; U4.12@-888.43,1125.79 -888.43,1090 ; v1(-123,45) -123,-9.62 -253,-139.62 -253,-229.97 -325.03,-302 -379.97,-302 -417,-264.97 -417,175.06 -546,304.06 -546,880.09 -574.91,909 -850.97,909 -888.43,946.45 -888.43,1090 ; v1(90,45) 154,-19 433,-19 480,28 480,415 469.85,425.15 U2.15@302.13,425.15
  Bottom Layer w6: v1(-123,45) v1(90,45)
DI2: R17.2 TP20.1 U5.12 | length 3697.3
  Top Layer w6: R17.2@-850,1006.3 -850,978 -805,933 -564.97,933 -522,890.03 -522,314 -393,185 -393,-242 -365,-270 v1(-340,-270) ; v1(654,-270) 779,-395 779,-906 843,-970 930,-970 960,-1000 TP20.1@960,-1070 960,-1105 964.72,-1109.72 U5.12@964.72,-1150.79
  Bottom Layer w6: v1(-340,-270) v1(654,-270)
DO2: R22.2
EN: U2.19 U3.28 | length 2103.7
  Top Layer w6: v1(-194,-139) -217,-162 -217,-249.97 -92,-374.97 -92,-478 -44.85,-525.15 U3.28@2.56,-525.15 ; U2.19@302.13,503.91 471.09,503.91 540,435 540,-40 v1(576,-76)
  Bottom Layer w6: v1(-194,-139) -193,-140 24,-140 52,-112 540,-112 v1(576,-76)
EN2: R12.1 U3.25 | length 107.6
  Top Layer w6: R12.1@-50,-401.57 -50,-450 -33.91,-466.09 U3.25@2.56,-466.09